# Altium PCB ifly watch_v3.PcbDoc
Units mil, origin at the board's own origin, x right, y up, seen from the top; angles counter-clockwise.
Board outline 2976.01 x 1191.13 mil, 2 copper layers (Top Layer, Bottom Layer); 61 components, 48 nets, 272 pads, 41 vias.
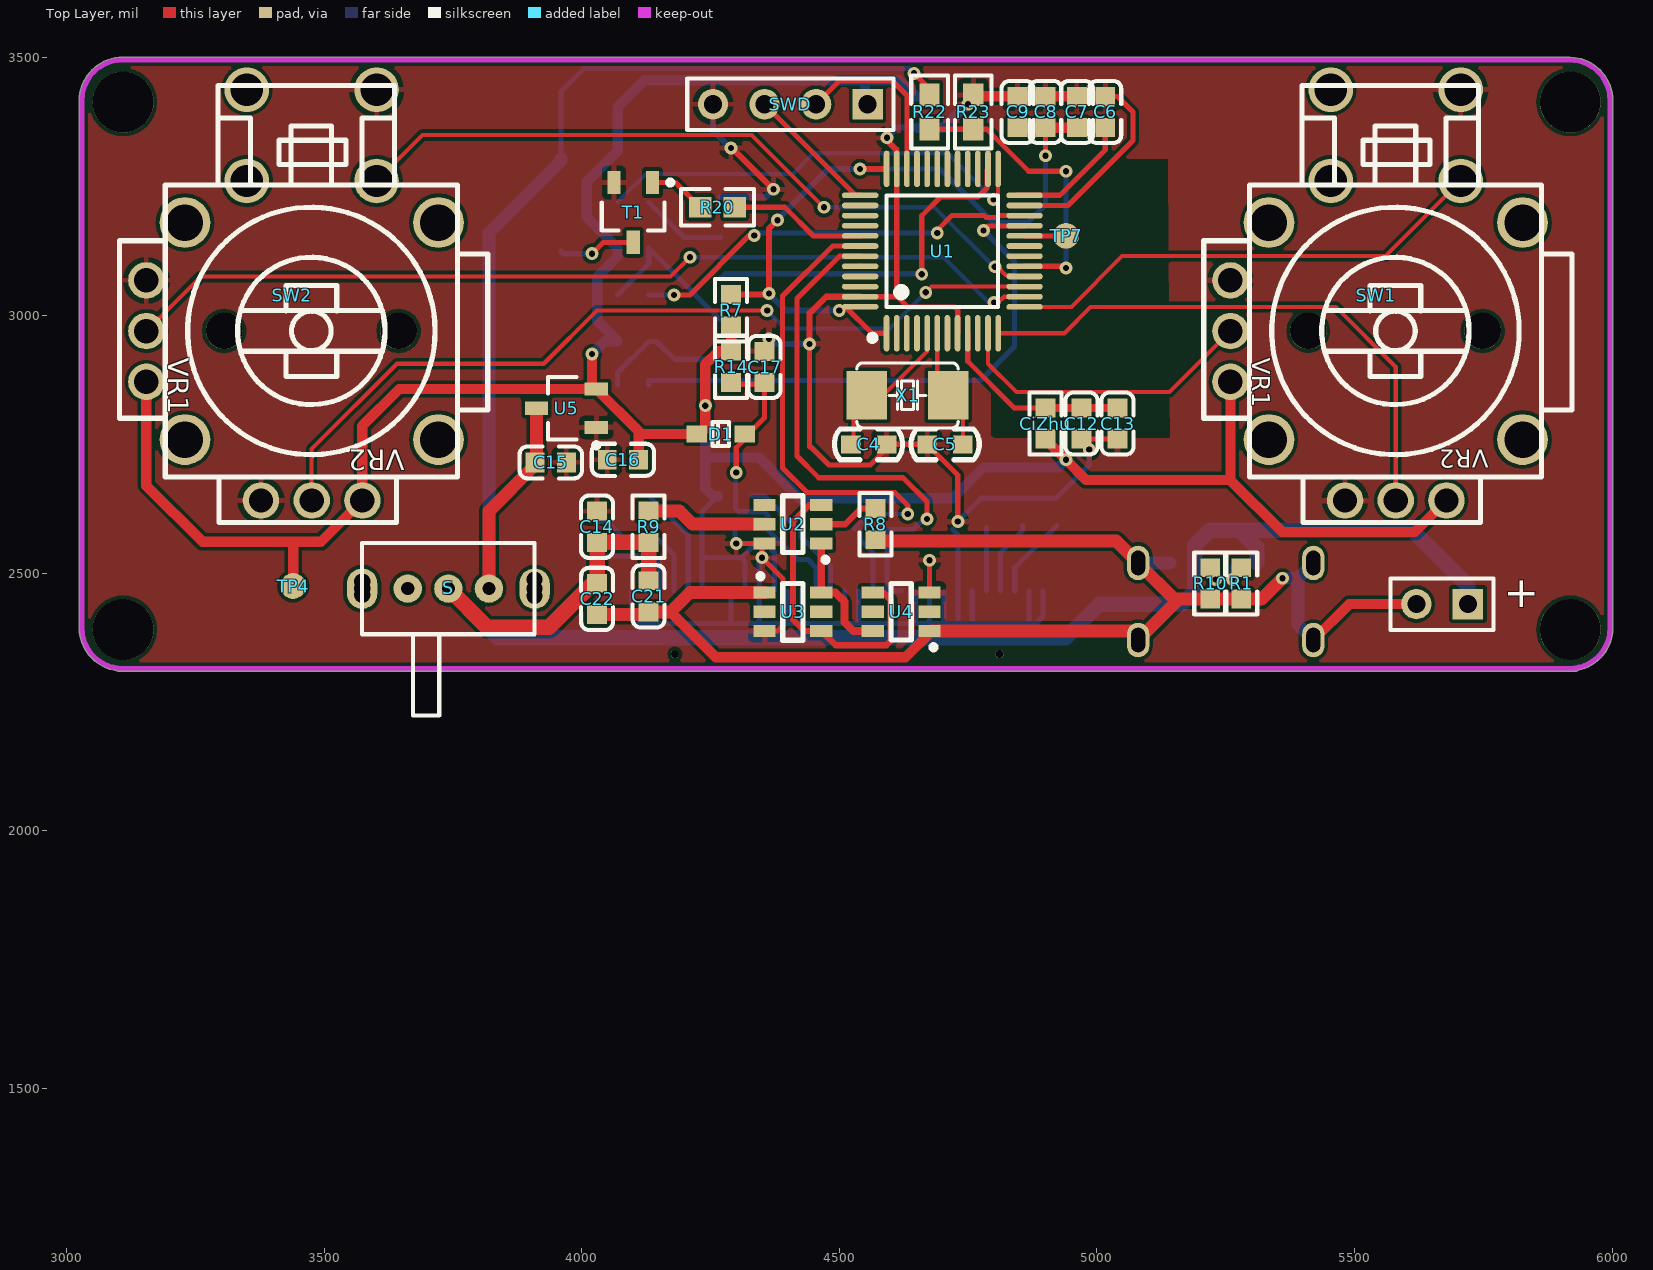
[diagram p0: Top Layer view]
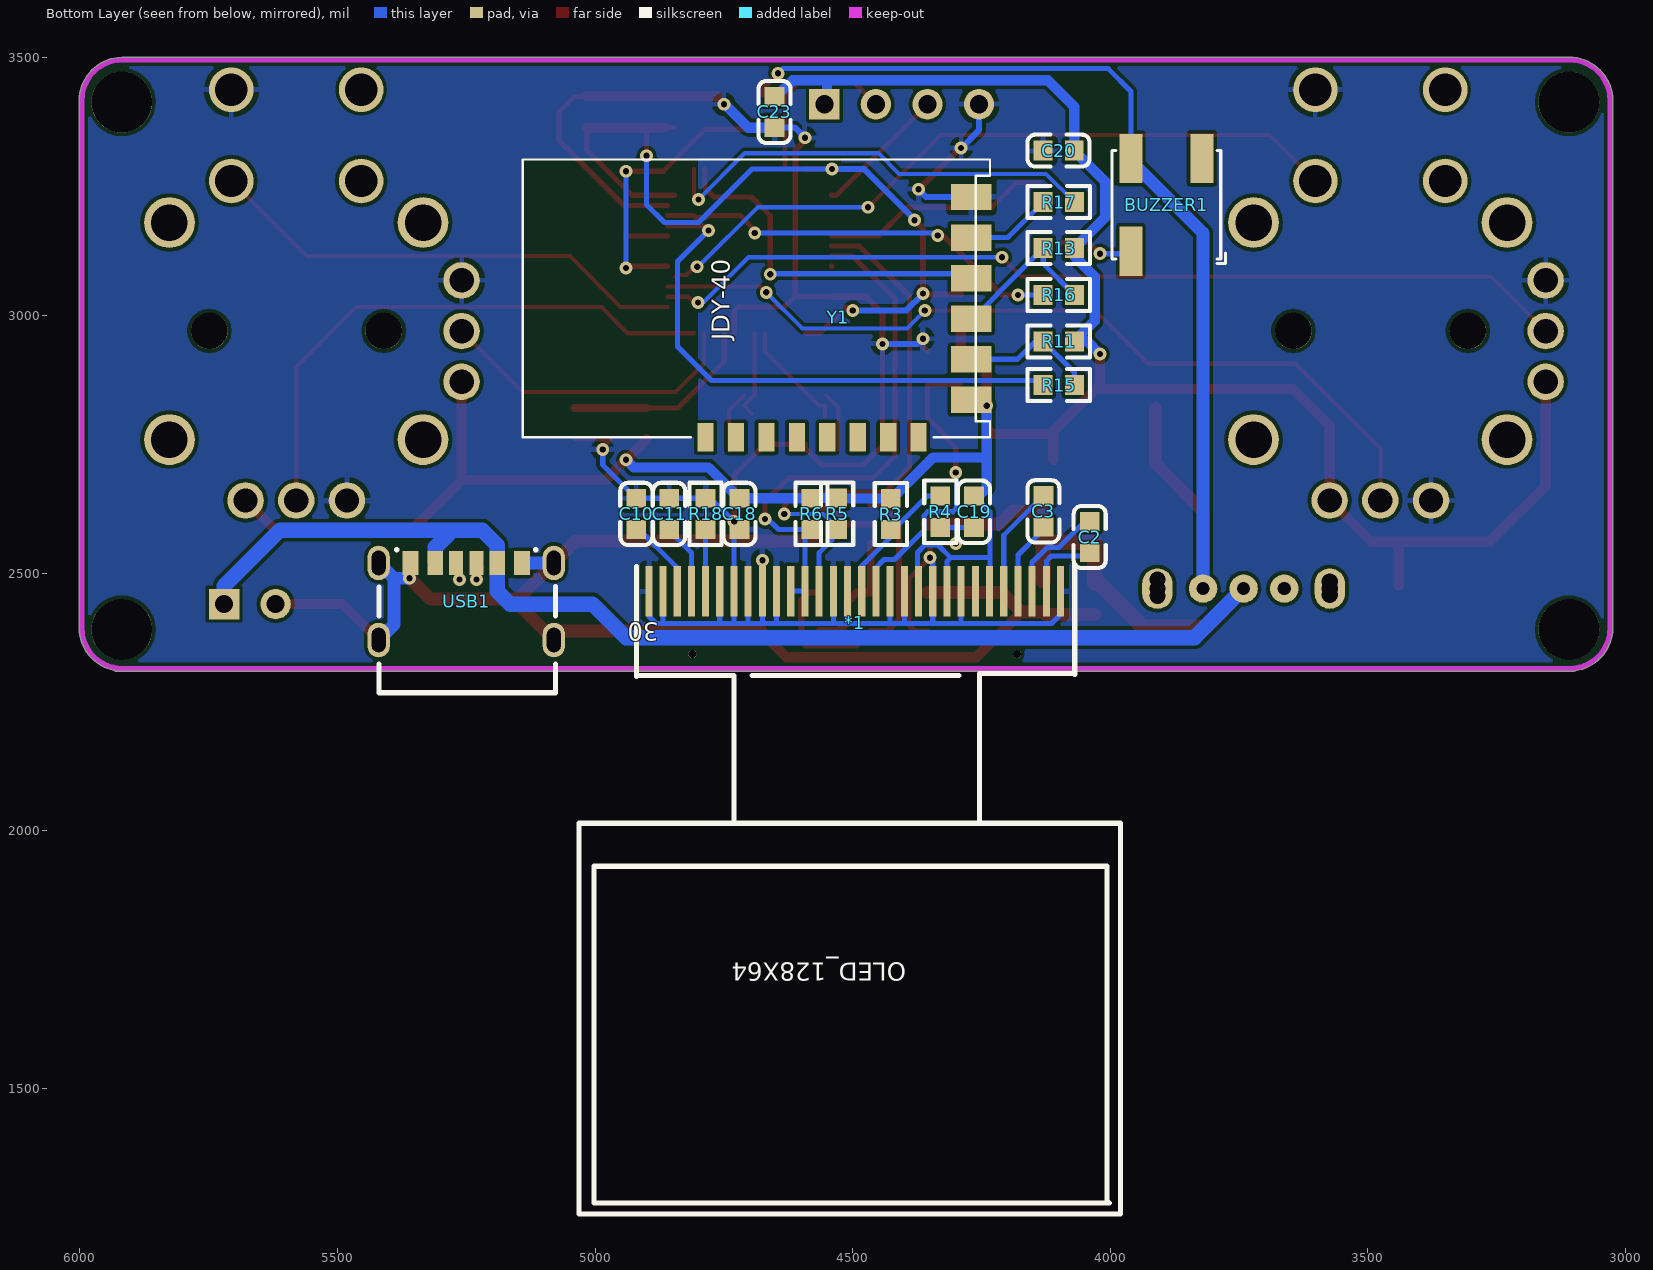
[diagram p1: Bottom Layer view, seen from below]
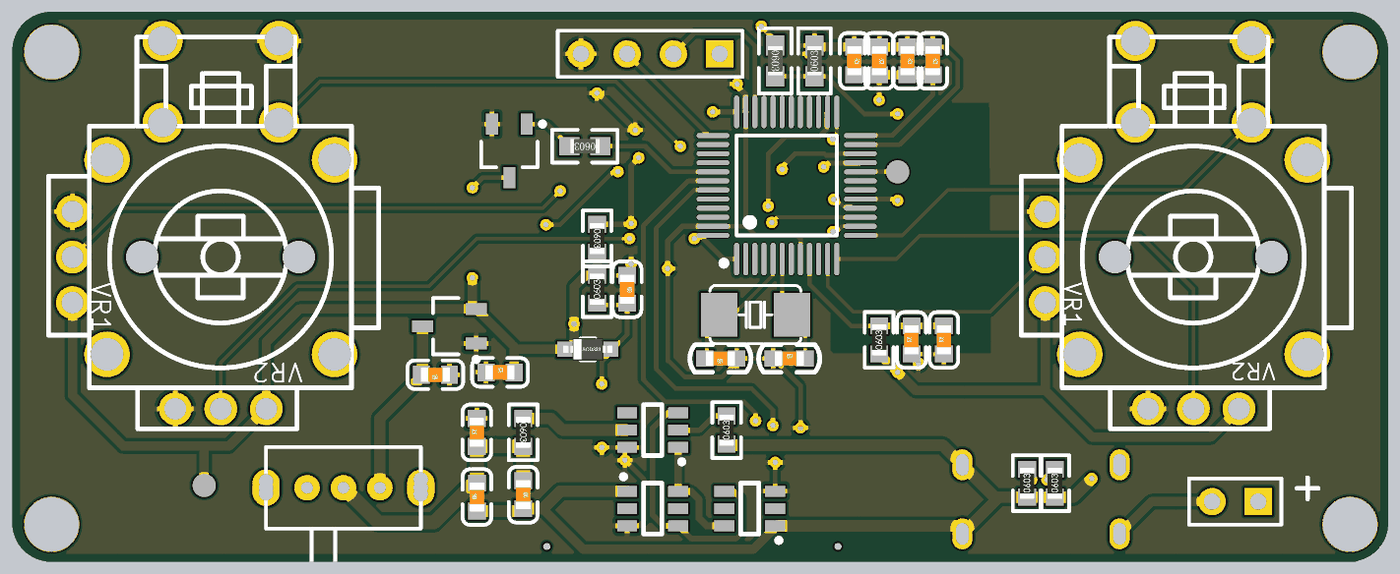
[diagram p2: 3D render of the assembled board from above, using the file's embedded part models]
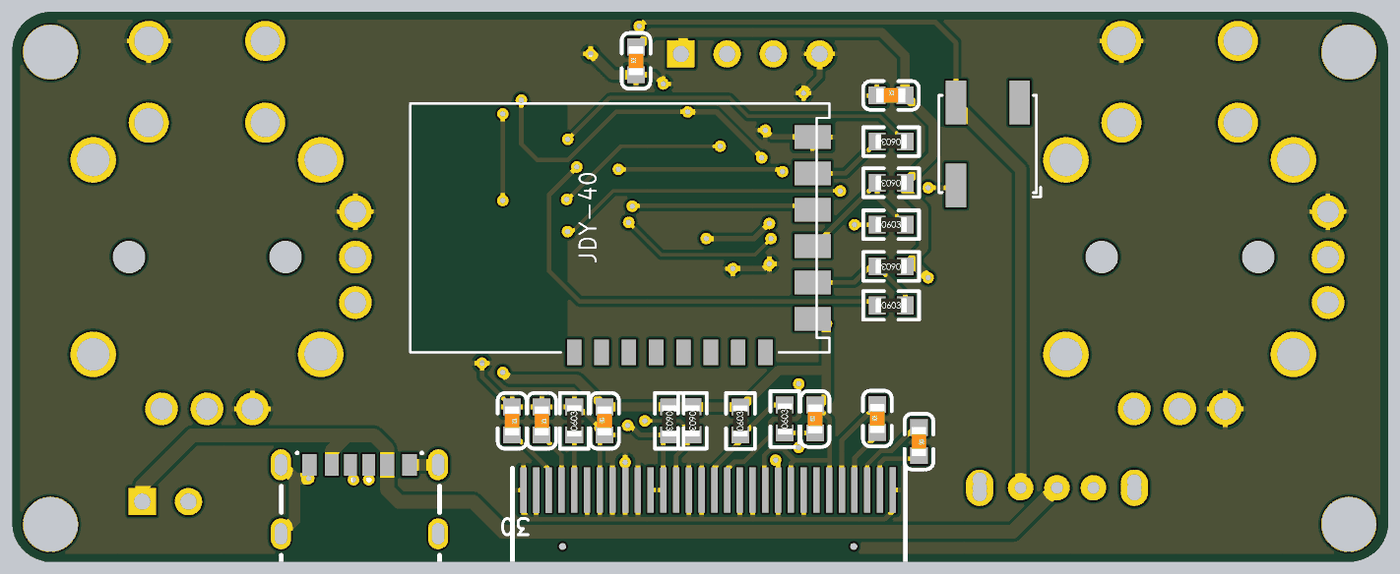
[diagram p3: 3D render of the assembled board from below, using the file's embedded part models]

## Layer stack, top to bottom
Top Solder: solder mask 0.4, Solder Resist, Dk 3.5
Top Layer: signal copper 1.4
Dielectric 1: dielectric 12.6, FR-4, Dk 4.8
Bottom Layer: signal copper 1.4
Bottom Solder: solder mask 0.4, Solder Resist, Dk 3.5

## Board outline
3024.99,2393.74 ccw(c3108.74,2393.74) 3097.31,2310.77 ccw(c3100,2315) 3100,2309.98 5930,2309.99 ccw(c5930,2315) 5933.7,2311.62 ccw(c5917.24,2393.74) 6001,2393.74 ccw(c5995.98,2393.74) 6001,2393.77 6001,3417.36 ccw(c5917.24,3417.36) 5918.91,3501.1 ccw(c5918.5,3496.1) 5918.5,3501.12 3108.74,3501.12 ccw(c3108.74,3417.36) 3024.99,3417.36

## Design rules (kind name [scope] priority, off if disabled: settings)
Clearance [All] p1: gap=7 ignorepadtopadclearanceinfootprint=FALSE
MinimumSolderMaskSliver [All] p1: minsoldermaskwidth=0
PolygonConnect [All] p1: connectstyle=Relief reliefconductorwidth=10 reliefentries=4 polygonreliefangle="90 Angle" airgapwidth=10
RoutingVias [All] p1: holewidth=12 width=25 viastyle="Through Hole" minholewidth=12 minwidth=25 maxholewidth=25 maxwidth=50
SilkToSilkClearance [All] p1: silktosilkclearance=0
SilkToSolderMaskClearance [IsPad] p1: minsilkscreentomaskgap=0 clearancetoexposedcopper=TRUE
SolderMaskExpansion [All] p1: expansion=4
Width [All] p1: maxlimit=100 minlimit=7 preferedwidth=10
27 further rules are at their usual default settings.

## Components (designator, comment, footprint, x,y, rotation, side; value= is the part's Value field where it differs from the comment)
*1 "OLED_30Pin" OLED_0.96-30P-P0.70-12864 4495.98,2464.99 r0 bottom
+ "Header 2" HDR1X2 5720,2440 r180 top (schematic designator BAT)
BUZZER1 "MLT-5020" BUZ-SMD_3P-L5.2-W5.2-P3.50-BR 3891.1,3214.94 r180 bottom
C2 "1uF" LC-0603_C 4040,2570 r270 bottom
C3 "1uF" LC-0603_C 4130,2620 r90 bottom
C4 "20pf" C0603 4591.73,2750 r180 top value=22pF
C5 "22pF" C0603 4670.47,2750 r0 top
C6 "104" LC-0603_C 5016.05,3395 r270 top
C7 "104" LC-0603_C 4961.05,3395 r270 top
C8 "104" LC-0603_C 4900.27,3395 r270 top
C9 "104" LC-0603_C 4846.05,3395 r270 top
C10 "2.2uF" LC-0603_C 4920,2615 r270 bottom
C11 "4.7uF" LC-0603_C 4856.06,2615 r270 bottom
C12 "104" LC-0603_C 4970,2790.31 r90 top
C13 "1uF" LC-0603_C 5040,2790.31 r90 top
C14 "104" LC-0603_C 4029.68,2590 r90 top
C15 "1uF" LC-0603_C 3940,2715 r180 top
C16 "1uF" LC-0603_C 4080,2720 r0 top
C17 "106" LC-0603_C 4354.88,2900 r270 top
C18 "1uF" LC-0603_C 4720,2615 r90 bottom
C19 "1uF" LC-0603_C 4264.57,2619.06 r90 bottom
C20 "104" LC-0603_C 4100.43,3320 r180 bottom
C21 "104" LC-0603_C 4130,2455 r270 top
C22 "106" LC-0603_C 4030,2450 r90 top
C23 "104" LC-0603_C 4651.81,3395 r90 bottom
CiZhu "600R" 0603_R 4900,2790.31 r90 top value=?
D1 "1N4148WS T4" LC-SOD-323 4270,2770 r0 top
R1 "5.1kΩ" LC-0603_R 5280,2480 r90 top
R3 "4.7KΩ" LC-0603_R 4426.09,2614.68 r90 bottom
R4 "4.7KΩ" LC-0603_R 4330,2619.06 r90 bottom
R5 "4.7KΩ" LC-0603_R 4530,2615.32 r270 bottom
R6 "4.7KΩ" LC-0603_R 4580,2615 r270 bottom
R7 "0Ω" LC-0603_R 4290,3010.32 r270 top
R8 "1KΩ" LC-0603_R 4570,2595 r90 top
R9 "100Ω" LC-0603_R 4130,2590 r270 top
R10 "5.1kΩ" LC-0603_R 5220,2480 r90 top
R11 "4.7KΩ" LC-0603_R 4100,2949.74 r0 bottom
R13 "4.7KΩ" LC-0603_R 4100,3130.87 r0 bottom
R14 "4.7KΩ" LC-0603_R 4290,2900.32 r90 top
R15 "100Ω" LC-0603_R 4100,2865 r180 bottom
R16 "100Ω" LC-0603_R 4100,3040 r180 bottom
R17 "100Ω" LC-0603_R 4100,3220 r0 bottom
R18 "1MΩ" LC-0603_R 4785.59,2615 r90 bottom
R20 "10k" R0603 4263.46,3210 r180 top value=1KΩ
R22 "10k" R0603 4675.12,3395 r270 top value=10KΩ
R23 "10k" R0603 4760,3395 r90 top value=10KΩ
S "SW-SPDT" 8.5*3.5_3P 3741.26,2471.97 r0 top
SW1 "RKJXV1224005" RKJXV1224005 5579.94,2969.74 r180 top
SW2 "RKJXV1224005" RKJXV1224005 3475.98,2969.74 r180 top
SWD "Header 4" HDR1X4 4554.88,3410 r180 top
T1 "SS8050" SOT-23-3L 4100,3200 r90 top
TP4 "TestPoint" TestPoint 3440,2475 r90 top
TP7 "TestPoint" TestPoint 4940,3154.53 r90 top
U1 "STM32F103C8T6" LC-LQFP-48_7x7x05P 4700,3125 r0 top
U2 "DW01KA" SOT-23-6 4410,2595 r0 top
U3 "SC8205C" SOT-23-6 4410,2425 r180 top
U4 "SC8205C" SOT-23-6 4620,2425 r0 top
U5 "SC662K-3.3V" SOT-23-3L 3970.31,2820 r0 top
USB1 "TYPE-C 6P" TYPE-C-SMD_TYPE-C-6P 5250,2445 r180 bottom
X1 "5032" SMD5032-2 4632.36,2845 r180 top
Y1 "JDY-40_1" "JDY-401 -No via" 4785.42,2763.43 r90 bottom

## Footprints (in the part's own frame and the unit in brackets; to place one, negate y for a bottom-side part, rotate by r counter-clockwise, add the part's x,y. Pads: shape width x height; smd on the part's side, far side on the other; paste and mask are expansions set on the pad)
8.5*3.5_3P [mm]
  round 1.4 hole 0.65: 1(2,-0.05) 2(0,-0.05) 3(-2,-0.05)
  oval 1.5x2 hole 0.8: 4(-4.25,-0.05) 5(4.25,-0.05)
  round 0.8 hole 0.8: 18(-4.25,0.3) 19(-4.25,-0.35) 20(4.25,0.4) 21(4.25,-0.4)
  silkscreen extent -4.25,-6.3 4.25,2.2
0603_R [mm]
  rect 0.93x0.98 smd: 1(-0.77,0) 2(0.77,0)
  silkscreen extent -1.53,-0.79 1.54,0.79, body extent -0.85,-0.4 0.85,0.4, height 0.56
BUZ-SMD_3P-L5.2-W5.2-P3.50-BR [mm]
  rect 1.12x2.425 smd: 1(1.75,2.288) 2(-1.75,2.288) 3(-1.75,-2.287)
  silkscreen extent -2.68,-2.9 2.9,2.68
C0603 [mil]
  rect 38x35 smd: 1(0,0) 2(69,0)
  silkscreen extent -31,-30 101,30, body extent 4,-16 67,16, height 12
HDR1X2 [mm] "Connector; Header; 2 Position"
  rect 1.5x1.5 hole 0.9: 1(0,0)
  round 1.5 hole 0.9: 2(2.54,0)
  silkscreen extent -1.27,-1.27 3.81,1.27
HDR1X4 [mm] "Connector; Header; 4 Position"
  rect 1.5x1.5 hole 0.9: 1(0,0)
  round 1.5 hole 0.9: 2(2.54,0) 3(5.08,0) 4(7.62,0)
  silkscreen extent -1.27,-1.27 8.89,1.27
"JDY-401 -No via" [mm] "串口透传"
  rect 1.4x0.8 smd: 1(0,0) 2(0,-1.5) 3(0,-3) 4(0,-4.5) 5(0,-6) 6(0,-7.5) 7(0,-9) 8(0,-10.5)
  rect 1.3x2 smd: 9(1.85,-13.092) 10(3.85,-13.092) 11(5.85,-13.092) 12(7.85,-13.092) 13(9.85,-13.092) 14(11.85,-13.092)
  silkscreen extent 0,-14.02 13.7,9.01
LC-0603_C [mm]
  rect 0.93x0.98 smd: 1(-0.77,0) 2(0.77,0)
  silkscreen extent -1.53,-0.79 1.54,0.79, body extent -0.8,-0.4 0.8,0.4, height 0.3
LC-0603_R [mm]
  rect 0.93x0.98 smd: 1(-0.77,0) 2(0.77,0)
  silkscreen extent -1.53,-0.79 1.54,0.79, body extent -0.85,-0.4 0.85,0.4, height 0.56
LC-LQFP-48_7x7x05P [mm]
  oval 0.28x1.8 smd mask+0.051: 1(-2.75,-4.05) 2(-2.25,-4.05) 3(-1.75,-4.05) 4(-1.25,-4.05) 5(-0.75,-4.05) 6(-0.25,-4.05) 7(0.25,-4.05) 8(0.75,-4.05) 9(1.25,-4.05) 10(1.75,-4.05) 11(2.25,-4.05) 12(2.75,-4.05) 25(2.75,4.05) 26(2.25,4.05) 27(1.75,4.05) 28(1.25,4.05) 29(0.75,4.05) 30(0.25,4.05) 31(-0.25,4.05) 32(-0.75,4.05) 33(-1.25,4.05) 34(-1.75,4.05) 35(-2.25,4.05) 36(-2.75,4.05)
  oval 1.8x0.28 smd mask+0.051: 13(4.05,-2.75) 14(4.05,-2.25) 15(4.05,-1.75) 16(4.05,-1.25) 17(4.05,-0.75) 18(4.05,-0.25) 19(4.05,0.25) 20(4.05,0.75) 21(4.05,1.25) 22(4.05,1.75) 23(4.05,2.25) 24(4.05,2.75) 37(-4.05,2.75) 38(-4.05,2.25) 39(-4.05,1.75) 40(-4.05,1.25) 41(-4.05,0.75) 42(-4.05,0.25) 43(-4.05,-0.25) 44(-4.05,-0.75) 45(-4.05,-1.25) 46(-4.05,-1.75) 47(-4.05,-2.25) 48(-4.05,-2.75)
  silkscreen extent -3.6,-4.42 2.75,2.75
LC-SOD-323 [mm]
  rect 1x0.83 smd: 1(1.18,0) 2(-1.18,0)
  silkscreen extent -0.4,-0.6 0.4,0.6, body extent -1.35,-0.62 1.35,0.62, height 1.1
OLED_0.96-30P-P0.70-12864 [mm]
  rect 0.351x2.499 smd: 1(-10.149,-0.002) 2(-9.444,0) 3(-8.744,0) 4(-8.044,0) 5(-7.344,0) 6(-6.644,0) 7(-5.944,0) 8(-5.244,0) 9(-4.544,0) 10(-3.844,0) 11(-3.144,0) 12(-2.444,0) 13(-1.744,0) 14(-1.044,0) 15(-0.344,0) 16(0.356,0) 17(1.056,0) 18(1.756,0) 19(2.456,0) 20(3.156,0) 21(3.856,0) 22(4.556,0) 23(5.256,0) 24(5.956,0) 25(6.656,0) 26(7.356,0) 27(8.056,0) 28(8.751,0.001) 29(9.45,0.002) 30(10.149,0.002)
  round 0.4 hole 0.4 unplated: ""(-8,3.1) ""(8,3.1)
  silkscreen extent -13.1,-1.3 13.6,30.7
R0603 [mm]
  rect 1.1x1 smd: 1(-0.85,0) 2(0.85,0)
  silkscreen extent -1.8,-0.9 1.8,0.9, body extent -0.8,-0.4 0.8,0.4, height 0.45
RKJXV1224005 [mm]
  round 1.8 hole 1.2: 1(8.15,-2.5) 2(8.15,0) 3(8.15,2.5) 4(2.5,8.35) 5(0,8.35) 6(-2.5,8.35)
  round 2.5 hole 1.8: 7(-6.25,5.35) 8(-6.25,-5.35) 9(6.25,-5.35) 10(6.25,5.35)
  round 2.2 hole 1.6: a(-3.2,-7.4) b(-3.2,-11.9) c(3.2,-7.4) d(3.2,-11.9)
  round 1.8 hole 1.8 unplated: ""(-4.284,-0.006) ""(4.316,-0.006)
  silkscreen extent -8.68,-12.11 9.47,9.44
SMD5032-2 [mm]
  rect 2x2.4 smd: 1(-2,0) 2(2,0)
  silkscreen extent -2.5,-1.6 2.5,1.6
SOT-23-3L [mm] "http://www.aosmd.com/res/packaging_information/SOT-23-3L.pdf"
  rect 1.15x0.65 smd: 1(1.475,-0.95) 2(1.475,0.95) 3(-1.475,0)
  silkscreen extent -0.9,-1.95 1.6,1.55, body extent -0.9,-1.55 0.9,1.55, height 1.25
SOT-23-6 [mm]
  rect 1.1x0.6 smd: 1(1.4,-0.95) 2(1.4,0) 3(1.4,0.95) 4(-1.4,0.95) 5(-1.4,0) 6(-1.4,-0.95)
  silkscreen extent -0.5,-1.87 1.73,1.4
TestPoint [mil]
  round 50 smd: 1(0,0)
TYPE-C-SMD_TYPE-C-6P [mm]
  oval 1.1x1.7 hole 0.7 slot 1.2 at 90 deg: 7(-4.32,-1.9) 7(-4.32,1.9) 7(4.32,-1.9) 7(4.32,1.9)
  rect 0.7x1.2 smd: A5(-0.5,1.9) B5(0.5,1.9)
  rect 0.76x1.2 smd: A9(1.52,1.9) B9(-1.52,1.9)
  rect 0.8x1.2 smd: A12(2.75,1.9) B12(-2.75,1.9)
  silkscreen extent -4.3,-4.5 4.4,2.55

## Part data
+: "Header, 2-Pin", LatestRevisionDate=17-Jul-2002, LatestRevisionNote="Re-released for DXP Platform.", Publisher="Altium Limited"
BUZZER1: BOM_JLCPCB Part Class="Extended Part", BOM_Manufacturer=HNDZ, BOM_Manufacturer Part=MLT-5020, BOM_Supplier=LCSC, BOM_Supplier Part=C94598, spicePre=B, spiceSymbolName=MLT-5020
C2 C3 C13 C15 C16 C18 C19 C22: library part "0603 1uF (105) 10% 50V", "贴片电容", Package=0603, SuppliersPartNumber=C15849, ComponentLink1Description=供应商链接, ComponentLink1URL=http://www.szlcsc.com/product/details_16531.html, Supplier=LC
C4 C5: library part "Cap Chip 0805", "Polarized Capacitor (Radial)", Published=8-Jun-2000, Publisher="Altium Limited", Revision="July-2002: Re-released for DXP Platform."
C6 C7 C8 C9 C12 C14 C20 C21: library part "0603 100nF (104) 10% 50V", "贴片电容", Package=0603, SuppliersPartNumber=C14663, ComponentLink1Description=供应商链接, ComponentLink1URL=http://www.szlcsc.com/product/details_15331.html, Supplier=LC
C10: library part "0603 2.2uF (225) 10% 16V", "贴片电容", Package=0603, SuppliersPartNumber=C23630, ComponentLink1Description=供应商链接, ComponentLink1URL=http://www.szlcsc.com/product/details_24366.html, Supplier=LC
C11: library part "0603 4.7uF (475) 10% 16V", "贴片电容", Package=0603, SuppliersPartNumber=C19666, ComponentLink1Description=供应商链接, ComponentLink1URL=http://www.szlcsc.com/product/details_20375.html, Supplier=LC
C17: library part "0603 10uF (106) 10% 10V", "贴片电容", Package=0603, SuppliersPartNumber=C19702, ComponentLink1Description=供应商链接, ComponentLink1URL=http://www.szlcsc.com/product/details_20411.html, Supplier=LC
C23: library part "Cap Chip 0603", "Polarized Capacitor (Radial)", Published=8-Jun-2000, Publisher="Altium Limited", Revision="July-2002: Re-released for DXP Platform."
CiZhu: library part Cizhu, "电阻_磁珠"
D1: library part "SOD-323 1N4148WS T4", "二极管", Package=SOD-323, SuppliersPartNumber=C2128, ComponentLink1Description=供应商链接, ComponentLink1URL=http://www.szlcsc.com/product/details_2485.html, Supplier=LC
R1 R9 R10 R15 R16 R17: library part "0603 100Ω (1000) 1%", "贴片电阻", Package=0603, SuppliersPartNumber=C22775, ComponentLink1Description=供应商链接, ComponentLink1URL=http://www.szlcsc.com/product/details_23502.html, Supplier=LC
R3 R4 R5 R6 R11 R13 R14: library part "0603 4.7KΩ (4701) 1%", "贴片电阻", Package=0603, SuppliersPartNumber=C23162, ComponentLink1Description=供应商链接, ComponentLink1URL=http://www.szlcsc.com/product/details_23889.html, Supplier=LC
R7: library part "0603 0Ω (0R0) 1%", "贴片电阻", Package=0603, SuppliersPartNumber=C21189, ComponentLink1Description=供应商链接, ComponentLink1URL=http://www.szlcsc.com/product/details_21903.html, Supplier=LC
R8: library part "0603 1KΩ (1001) 1%", "贴片电阻", Package=0603, SuppliersPartNumber=C21190, ComponentLink1Description=供应商链接, ComponentLink1URL=http://www.szlcsc.com/product/details_21904.html, Supplier=LC
R18: library part "0603 1MΩ (1004) 1%", "贴片电阻", Package=0603, SuppliersPartNumber=C22935, ComponentLink1Description=供应商链接, ComponentLink1URL=http://www.szlcsc.com/product/details_23662.html, Supplier=LC
R20 R22 R23: library part "Resistor Chip 0805", "Resistor", Published=8-Jun-2000, Publisher="Altium Limited", Revision="July-2002: Re-released for DXP Platform."
S: "SPDT Subminiature Toggle Switch, Right Angle Mounting, Vertical Actuation", Datasheet="Latest Revision: 05-Dec-2000", Published=24-Mar-1999, Publisher="Altium Limited", Revision 1="Jul-2002: Re-released for DXP Platform.", Revision 2="17-Dec-2003: Schematic revised, PCB Footprint replaced."
SW1 SW2: BOM_JLCPCB Part Class="Extended Part", BOM_Manufacturer="ALPS Electric", BOM_Manufacturer Part=RKJXV1224005, BOM_Supplier=LCSC, BOM_Supplier Part=C146170, Contributor=LCSC, spicePre=S, spiceSymbolName=RKJXV1224005
SWD: "Header, 4-Pin", LatestRevisionDate=17-Jul-2002, LatestRevisionNote="Re-released for DXP Platform.", Publisher="Altium Limited"
T1: library part NPN
U1: "STM32 ARM-based 32-bit MCU with 64 Kbytes Flash, 48-pin LQFP, Industrial Temperature"
U2: "锂电池保护芯片"
U3 U4: "二合一MOS"
U5: "LDO"
USB1: BOM_JLCPCB Part Class="Extended Part", BOM_Manufacturer="SHOU HAN", BOM_Manufacturer Part="TYPE-C 6P", BOM_Supplier=LCSC, BOM_Supplier Part=C456012, Contributor=LCSC, spicePre=U, spiceSymbolName="TYPE-C 6P"
X1: library part XTAL, "Crystal Oscillator", Frequency=8MHz, Published=8-Jun-2000, Publisher="Altium Limited", Revision="July-2002: Re-released for DXP Platform."
Y1: "串口透传无过孔"

## Free pads (board coordinates)
  round 118.11 hole 118.11: M3(3110,2390.55) M3(3110,3414.17) M3(5918.5,2390.55) M3(5918.5,3414.17)

## Via types
v1: diameter 25, hole 12, Top Layer to Bottom Layer, 41 vias

## Nets (pads, with @x,y where several pads share a name; then routed paths per layer and width w, separated by ;. In a path a pad name is that pad's centre, name@x,y a point inside that pad or via, vN(x,y) a via of type N, cw(c..) or ccw(c..) an arc to the next point about the centre after c; other vN are vias at no path point)
3V3: *1.6 *1.9 *1.11 C16.2 C18.2 C19.2 C20.2 C23.2 CiZhu.1 D1.2 R3.2 R5.1 R6.1 R7.2 R11.1 R13.1 R14.2 SW1.3 SW1.6 SW2.3 SW2.6 SWD.1 TP4.1 U5.2 Y1.9 | length 5784.8
  Top Layer w20: SW2.3 3155.12,2669.88 3264.34,2560.66 3440,2560.66 ; TP4.1 3440,2560.66 ; v1(4020,2925) 4020,2865.79 U5.2 ; C16.2 4110.63,2720.32 4110.63,2770 ; R7.2 R14.2 4265.63,2930.63 4240,2905 v1(4240,2825) 4240,2780 4230,2770 D1.2 4110.63,2770 ; CiZhu.1 v1(4940,2720) 4979.38,2680.62 5259.07,2680.62 ; SW1.3@5259.07,2851.32 5259.07,2680.62 ; SW1.6 5617.36,2580 5359.69,2580 5259.07,2680.62 ; 3440,2560.66 3494.07,2560.66 SW2.6 3574.41,2785.73 3646.08,2857.4 U5.2 ; U5.2 4110.63,2775.16 4110.63,2770
  Bottom Layer w10: *1.6@4233.28,2465 *1.6 4233.28,2466.13 4233.28,2530 ; C19.2@4263.56,2649.37 4233.28,2619.09 4233.28,2530 ; *1.9 4317.08,2522.76 4309.84,2530 ; *1.11 4374.5,2467.3 4374.5,2540.15 4360.15,2554.5 4334.34,2554.5 4309.84,2530 ; 4233.28,2530 4309.84,2530
  Bottom Layer w20: v1(4020,2925) 4044.74,2949.74 R11.1 4030,2989.43 4030,3075 4069.69,3114.69 R13.1 4010,3190.55 4010,3259.89 C20.2 4070.11,3404.57 4069.69,3405 4121.21,3456.53 4550,3456.53 ; v1(4240,2825) 4240,2720 ; C19.2@4255.2,2649.69 4240,2664.88 4240,2720 ; C19.2@4263.56,2649.37 C19.2 ; SWD.1 4550,3414.88 4550,3456.53 ; C23.2 4647.97,3425.32 4616.75,3456.53 4550,3456.53 ; v1(4940,2720) 4925,2705 4779.69,2705 C18.2 4580.31,2645.32 R6.1 4579.68,2645.63 R5.1 4529.37,2645 R3.2 4423.11,2645 4343.61,2724.5 4244.5,2724.5 4240,2720
BAT: +.1 C14.1 C21.1 C22.2 R9.2 S.2 USB1.A9 USB1.B9 | length 2913.2
  Top Layer w30: S.2 3816.26,2395 3936.6,2395 4021.92,2480.32 C22.2 4030,2559.37 C14.1 4070,2559.68 ; 4070.98,2560.66 4070,2559.68 ; C21.1 R9.2 4070,2559.68
  Bottom Layer w30: S.2 3836.26,2375 4940,2375 5005,2440 5164.92,2440 5190.16,2465.24 USB1.A9 5190.16,2554.37 5219.36,2583.57 5611.43,2583.57 5720,2475 +.1 ; 5284.73,2575.27 5309.84,2550.16 USB1.B9
BAT+: BUZZER1.2 C15.2 R22.1 S.1 U5.3 | length 2192.2
  Top Layer w10: v1(4645,3470) 4675.12,3439.88 R22.1
  Top Layer w25: S.1@3820,2460 S.1 3820,2620.31 3912.24,2712.56 U5.3
  Bottom Layer w10: BUZZER1.2 3960,3435 4004.1,3479.1 4635.9,3479.1 v1(4645,3470)
  Bottom Layer w25: S.1@3820,2460 S.1 3820,3160 3960,3300 BUZZER1.2
BOOT0: U1.44 | length 0.7
  Top Layer w10: U1.44@4540.08,3095 U1.44
BOOT1: TP7.1 U1.20 | length 80.6
  Top Layer w10: U1.20 TP7.1
BUZZER: R20.1 U1.41 | length 266.6
  Top Layer w10: R20.1 4394.21,3210 4449.68,3154.53 U1.41
CS: R17.1 U1.25 | length 869.5
  Top Layer w8: v1(4799.49,3225) 4808.27,3233.78 U1.25
  Bottom Layer w8: R17.1 4124.69,3275 4410,3275 4450,3315 4709.49,3315 v1(4799.49,3225)
GND: *1.1 *1.8 *1.10 *1.12 *1.13 *1.16 *1.17 *1.21 *1.22 *1.23 *1.24 *1.25 *1.29 *1.30 C4.1 C5.1 C6.1 C7.1 C8.1 C9.1 C10.1 C11.1 C12.1 C13.1 C14.2 C15.1 C16.1 C17.1 C18.1 C19.1 C20.1 C23.1 R4.1 R18.2 R23.2 SW1.1 SW1.4 SW1.b SW2.1 SW2.4 SW2.b SWD.4 T1.2 U1.8 U1.23 U1.35 U1.47 U2.6 U3.3 U4.3 U5.1 Y1.14 | length 5411.8
  Top Layer w10: v1(4300,2557.6) U2.6 4350,2552.72 v1(4350,2530) 4390.98,2489.02 4390.98,2398.58 4380,2387.6 U3.3 ; v1(4442.4,2945) 4442.4,2745 4445,2745 4480,2710 4560,2710 4591.73,2741.73 C4.1 C5.1 4730,2690.47 v1(4730,2600) ; U1.47 4611.42,3036.42 ; U1.35 4611.42,3038.1 4632.79,3016.73 4723.27,3016.73 4730,3010 4730,2966.02 U1.8 ; U4.3 4675.12,2524.77 v1(4675.35,2525) ; U1.23 4944.1,3213.58 5070,3339.48 5070,3395 5039.69,3425.31 C6.1 ; v1(4985,2740) 4985,2745 C12.1 C13.1
  Top Layer w12: v1(4289.52,3325) 4292.2,3325 v1(4372.2,3245) ; C17.1 4363.51,2938.94 v1(4363.51,2955) ; v1(4442.4,2945) 4442.4,3004.25 4474.57,3036.42 U1.47 ; v1(4592.79,3345) 4592.79,3339.49 4610.73,3321.55 4610.73,3285.13 U1.35
  Top Layer w20: R23.2@4763.15,3425.32 C9.1 C8.1 C7.1 C6.1
  Bottom Layer w10: *1.1 4096.41,2419.69 4114.1,2402 4290,2402 ; C19.1 4297.28,2588.74 ; *1.8 4289.52,2402.48 4290,2402 ; v1(4300,2557.6) 4297.28,2560.32 4297.28,2588.74 ; R4.1 4297.28,2588.74 ; v1(4350,2530) 4344.64,2524.64 *1.10 4344.64,2406.64 4340,2402 ; *1.12 4399.76,2402.24 4400,2402 ; *1.13 4427.32,2404.68 4430,2402 ; *1.16 4510,2402 ; *1.17 4537.56,2404.44 4540,2402 ; *1.21 4647.79,2404.21 4650,2402 ; v1(4675.35,2525) *1.22 4675.35,2407.35 4670,2402 ; *1.23 4702.91,2404.91 4700,2402 ; C18.1 4730.47,2574.22 *1.24 4730.47,2402.47 4730,2402 ; v1(4730,2600) 4775.32,2645.32 R18.2 C11.1 C10.1 4920.31,2645.32 4985,2710 v1(4985,2740) ; *1.25 4758.03,2403.97 4760,2402 ; *1.29 4868.03,2403.97 4870,2402 ; *1.30 4895.55,2415.55 4882,2402 4870,2402 ; 4290,2402 4340,2402 ; 4340,2402 4400,2402 ; 4400,2402 4430,2402 ; 4430,2402 4510,2402 ; 4510,2402 4540,2402 ; 4540,2402 4650,2402 ; 4650,2402 4670,2402 ; 4670,2402 4700,2402 ; 4700,2402 4730,2402 ; 4730,2402 4760,2402 ; 4760,2402 4870,2402
  Bottom Layer w12: SWD.4 4254.88,3359.64 v1(4289.52,3325) ; Y1.14 4357.16,3229.96 v1(4372.2,3245) ; v1(4363.51,2955) 4373.51,2945 v1(4442.4,2945) ; v1(4592.79,3345) 4612.79,3365 4651.49,3365 C23.1
  Bottom Layer w20: C23.1 4702.72,3364.68 4748.03,3410 v1(4750,3410)
Net*1_2: *1.2 C2.2 | length 159.2
  Bottom Layer w10: C2.2@4030,2539.68 4036.68,2533 4114.37,2533 4124.17,2523.2 *1.2
Net*1_3: *1.3 C2.1 | length 210.4
  Bottom Layer w10: C2.1@4030,2600.32 C2.1 4049.68,2600.32 4100,2550 4122.48,2550 4151.73,2520.75 *1.3
Net*1_4: *1.4 C3.1 | length 141
  Bottom Layer w10: C3.1@4140,2589.68 4140,2574.29 4179.29,2535 *1.4
Net*1_5: *1.5 C3.2 | length 217.1
  Bottom Layer w10: C3.2 4206.85,2573.47 *1.5
Net*1_15: *1.15 R3.1 R4.2 | length 269
  Bottom Layer w10: R4.2 4355.63,2649.37 4415,2590 4426.09,2590 R3.1 4426.09,2570.29 4482.44,2513.94 *1.15
Net*1_26: *1.26 R18.1 | length 123.7
  Bottom Layer w10: *1.26 R18.1 R18.1@4785.59,2588.74
Net*1_27: *1.27 C11.2 | length 145.4
  Bottom Layer w10: *1.27 4813.15,2540 4856.06,2582.91 C11.2 C11.2@4856.06,2592.6
Net*1_28: *1.28 C10.2 | length 161.2
  Bottom Layer w10: *1.28 4840.51,2510.45 C10.2@4922.34,2592.28
NetBUZZER1_3: BUZZER1.3 T1.3 | length 151.1
  Top Layer w10: v1(4020,3120) 4041.93,3141.93 T1.3
  Bottom Layer w10: BUZZER1.3 3964.88,3120 v1(4020,3120)
NetC4_2: C4.2 U1.5 X1.2 | length 333.8
  Top Layer w8: C4.2@4527.4,2740 4527.4,2821.14 X1.2@4551.26,2845 ; X1.2@4553.62,2801.69 4553.62,2825 4565,2825 4670.47,2930.47 U1.5
NetC5_2: C5.2 U1.6 X1.1 | length 287.2
  Top Layer w8: U1.6 4690.16,2845.94 4711.1,2825 X1.1@4696.26,2810.16 ; X1.1 4740,2816.1 C5.2@4740,2740
NetR1_2: R1.2 USB1.A5 | length 50.5
  Top Layer w10: v1(5262.98,2487.49) 5262.98,2492.98 R1.2@5270,2500
  Bottom Layer w10: v1(5262.98,2487.49) 5262.98,2513.1 USB1.A5
NetR8_2: R8.2 U2.2 | length 117.4
  Top Layer w12: U2.2 4511.61,2595 4541.93,2625.32 R8.2
NetR9_1: R9.1 U2.5 | length 235.4
  Top Layer w25: R9.1 4189.69,2620.31 4215,2595 U2.5
NetR10_2: R10.2 USB1.B5 | length 47
  Top Layer w10: R10.2 5230,2520.32 v1(5230,2487.49)
NetR11_2: R11.2 R15.2 Y1.10 | length 263.9
  Bottom Layer w10: R15.2 4069.68,2889.11 R11.2 4145.26,2949.74 4180,2915 Y1.10
NetR13_2: R13.2 R16.2 Y1.11 | length 312.8
  Bottom Layer w10: R16.2 4130.32,3100.63 R13.2 4218.63,3042.55 4218.63,3041.92 4266.81,2993.74 Y1.11
NetR17_2: R17.2 Y1.13 | length 168.2
  Bottom Layer w10: R17.2 4199.09,3151.22 Y1.13
NetR20_2: R20.2 T1.1 | length 112.5
  Top Layer w10: T1.1 4181.93,3258.07 R20.2
OC: U2.3 U3.4 U4.4 | length 592.8
  Top Layer w12: U2.3 4442.4,2632.4 4410,2600 4410,2410.55 4432.96,2387.6 U3.4 4492.72,2360 4591.42,2360 4600,2368.58 4600,2447.64 4585.24,2462.4 U4.4
OD: U2.1 U3.6 U4.6 | length 249.3
  Top Layer w15: U2.1 U3.6 4492.48,2462.4 4510,2444.88 4510,2405 4527.4,2387.6 U4.6
PA1: SW1.2 U1.11 | length 601.5
  Top Layer w8: U1.11 4788.58,2906.42 4843.68,2851.32 5140.64,2851.32 SW1.2
PA2: SW1.5 U1.12 | length 1100
  Top Layer w8: U1.12 4936.85,2965.55 4987.73,3016.43 5463.57,3016.43 5579.94,2900.07 SW1.5
PA3: SW1.a U1.13 | length 947.7
  Top Layer w8: U1.13 4950.52,3016.73 5048.94,3115.16 5559.99,3115.16 SW1.a
PA4: SW2.2 U1.14 | length 1809.8
  Top Layer w8: SW2.2 3261.16,3075.79 4172.72,3075.79 v1(4210,3113.07) v1@4213.46,3116.54 ; v1(4800,3025) 4808.27,3025 4819.69,3036.42 U1.14
  Bottom Layer w8: v1(4210,3113.07) 4701.93,3113.07 4790,3025 v1(4800,3025)
PA5: SW2.5 U1.15 | length 1643
  Top Layer w8: SW2.5 3475.98,2740.98 3641.42,2906.42 3926.42,2906.42 4030,3010 v1(4360,3010) ; v1(4667.79,3045) 4678.89,3056.1 U1.15
  Bottom Layer w8: v1(4360,3010) 4395,2975 4597.79,2975 v1(4667.79,3045)
PA6: SW2.a U1.16 | length 1404.8
  Top Layer w8: SW2.a 3690.89,3350 4330,3350 v1(4470,3210) ; v1(4801.85,3094.61) 4807.03,3094.61 4822.69,3078.96 4840.51,3078.96 U1.16@4843.68,3075.79
  Bottom Layer w8: v1(4470,3210) 4684.73,3210 4797.24,3097.49 4797.24,3087.76 4801.85,3092.38 v1(4801.85,3094.61)
PGND: +.2 C21.2 C22.1 R1.1 R8.1 R10.1 U3.1 U4.1 USB1.7 USB1.A12 USB1.B12 | length 2786.9
  Top Layer w20: 4172.28,2424.68 4259.97,2337 4628.42,2337 U4.1@4679.02,2387.6 ; USB1.7@5420.08,2370.2 5489.88,2440 +.2
  Top Layer w25: C22.1 4125,2419.68 C21.2 4172.28,2424.68 4210,2462.4 U3.1 ; R8.1 4572.44,2562.25 5037.48,2562.25 5079.92,2519.8 5150.04,2449.69 5159.41,2449.69 ; U4.1@4679.02,2387.6 5079.92,2387.6 5079.92,2370.2 5159.41,2449.69 ; v1(5360,2490) 5319.69,2449.69 R1.1 R10.1 5159.41,2449.69
  Bottom Layer w25: USB1.7@5079.92,2519.8 USB1.A12 ; v1(5360,2490) 5390.27,2490 ; USB1.7@5420.08,2370.2 5390.27,2400 5390.27,2490 ; USB1.7@5420.08,2519.8 5390.27,2490
POWER: R22.2 R23.1 U1.17 | length 568.1
  Top Layer w10: R22.2 R23.1 4786.15,3361.54 4867.69,3280 v1(4940,3280) ; U1.17 4930,3095.47 4933.1,3092.38 v1(4940,3092.38)
  Bottom Layer w10: v1(4940,3092.38) v1(4940,3280)
RES#: *1.14 C17.2 D1.1 R14.1 | length 596.1
  Top Layer w10: R14.1 4293.54,2866.46 4354.88,2866.46 4354.88,2801.57 4316.46,2763.15 4316.46,2759.76 4300,2743.31 v1(4300,2695)
  Bottom Layer w10: v1(4300,2695) 4298.71,2693.71 4298.71,2626.09 4305.74,2619.06 4350.19,2619.06 4354.26,2619.05 4361.29,2612.02 4361.29,2583.71 4418.8,2526.2 4439.19,2526.2 4454.88,2510.51 *1.14
RESET: U1.7
SCL: *1.18 R5.2 U1.42 | length 1061.8
  Top Layer w10: 4390.98,2705 4390,2704.02 ; U1.42 4487.24,3134.84 4390,3037.6 4390,2704.02 ; v1(4632.79,2615) 4632.79,2631 4607.58,2656.21 4437.8,2656.21 4390,2704.02
  Bottom Layer w8: R5.2 4530,2587.84 4557.16,2615 v1(4632.79,2615)
  Bottom Layer w10: R5.2@4540,2584.68 4540,2564.8 4565.11,2539.68 *1.18
SDA: *1.19 *1.20 R6.2 U1.43 | length 1038.5
  Top Layer w10: U1.43 4500.16,3115.16 4417.9,3032.9 4417.9,2727.1 4460,2685 4623.79,2685 4670,2638.79 v1(4670,2605)
  Bottom Layer w10: R6.2 R6.2@4592.67,2584.68 ; *1.20 *1.19 R6.2@4592.67,2584.68 ; v1(4670,2605) 4670,2610.58 4644.1,2584.68 R6.2@4592.67,2584.68
SET: U1.26 Y1.12 | length 694.3
  Top Layer w10: v1(4660,3080) 4660,3193.74 4696.26,3230 4769.14,3230 4786.41,3247.27 4786.41,3282.28 U1.26
  Bottom Layer w10: Y1.12 4278.52,3081 4659,3081 v1(4660,3080)
SWCLK: SWD.3 U1.37 | length 258.9
  Top Layer w10: SWD.3 4531.61,3233.27 U1.37
SWDIO: SWD.2 U1.34 | length 349.1
  Top Layer w10: SWD.2 4499.88,3455 4603.25,3455 4631.1,3427.15 U1.34
USART3_RX: R16.1 U1.22 | length 799
  Top Layer w10: v1(4179.29,3040) 4210,3040 4325,3155 v1(4335,3155) ; v1(4690.16,3160) 4690.16,3165.63 4718.43,3193.9 4781.45,3193.9 4784.85,3190.5 4805.15,3190.5 4808.55,3193.9 U1.22
  Bottom Layer w10: R16.1 v1(4179.29,3040) ; v1(4335,3155) 4340,3160 v1(4690.16,3160)
USART3_TX: R15.1 U1.21 | length 1079.1
  Top Layer w10: v1(4780,3165) 4788.5,3173.5 4858.74,3173.5 U1.21
  Bottom Layer w10: R15.1 4130.31,2873.85 4773.85,2873.85 4840,2940 4840,3105 v1(4780,3165)
VDD: C6.2 C7.2 C8.2 C9.2 R7.1 U1.1 U1.24 U1.36 U1.48 | length 1719.8
  Top Layer w10: v1(4500,3010) 4505.43,3010 4512.17,3016.73 4563.35,2965.55 U1.1 ; v1(4540,3284.45) v1@4545.55,3284.45 ; U1.24@4846.06,3233.27 U1.24 4928.27,3233.27 5016.05,3321.05 C6.2 ; C9.2 C9.2@4864.5,3364.68 ; v1(4900,3310) 4900,3364.42 C8.2
  Top Layer w12: R7.1 4355.63,3040.63 4357.55,3042.55 v1(4363.51,3042.55) 4363.51,3168.51 v1(4380,3185) ; v1@4545.55,3284.45 U1.36
  Top Layer w20: C9.2@4864.5,3364.68 C8.2@4900,3364.68 ; C8.2 C6.2
  Bottom Layer w10: v1(4540,3284.45) 4695.2,3284.45 4799.27,3180.37 4865.37,3180.37 4900,3215 v1(4900,3310)
  Bottom Layer w12: v1(4363.51,3042.55) 4396.06,3010 v1@4490,3010 ; v1(4380,3185) 4380,3186.06 4478.39,3284.45 v1(4540,3284.45)
VDDA: C12.2 C13.2 CiZhu.2 U1.9 | length 382.7
  Top Layer w10: U1.9 4749.21,2911.05 4839.63,2820.63 CiZhu.2
  Top Layer w15: CiZhu.2 C12.2 C13.2
pads on no net: *1. *1.7 BUZZER1.1 S.3 S.4 S.5 S.18 S.19 S.20 S.21 SW1. SW1.7 SW1.8 SW1.9 SW1.10 SW1.c SW1.d SW2. SW2.7 SW2.8 SW2.9 SW2.10 SW2.c SW2.d U1.2 U1.3 U1.4 U1.10 U1.18 U1.19 U1.27 U1.28 U1.29 U1.30 U1.31 U1.32 U1.33 U1.38 U1.39 U1.40 U1.45 U1.46 U2.4 U3.2 U3.5 U4.2 U4.5 Y1.1 Y1.2 Y1.3 Y1.4 Y1.5 Y1.6 Y1.7 Y1.8

## Polygon pours and split planes (outlines as drawn)
GND on Top Layer "gnd" (solid, remove dead copper, pour order 0): 2900,3560 2960,3500 2960,2230 6035,2230 6250,2445 6250,3525 6160,3615
GND on Bottom Layer "gnd2" (solid, remove dead copper, pour order 2): 2920,3555 2970,3505 2970,2145 5980,2145 6130,2295 6080,2345 6080,3640

## Keep-outs
Keep-Out Layer:
  lines w10: 3100,2315 5930,2315 ; 3108.74,2315 cw(c3108.74,2393.74) 3030,2393.74 3030,3417.36 cw(c3108.74,3417.36) 3108.74,3496.1 5918.5,3496.1 ; 5917.24,2315 ccw(c5917.24,2393.74) 5995.98,2393.74 5995.98,3417.36 ccw(c5917.24,3417.36) 5917.24,3496.1

## Other copper
Top Layer:
  pour cut-out: 5137.95,3304.06 4794.16,3304.06 4794.16,2767.54 4800.32,2761.37 5142.28,2761.37
Bottom Layer:
  pour cut-out: 5141.73,3305 4800,3305 4800,2763.43 5141.73,2763.43

## Text inside footprints (layer, text, board x,y; h text height)
*1: Bottom Overlay "30" at 4876.54,2403.52 h35 r180; Bottom Overlay "OLED_128X64" at 4395.94,1744.02 h35 r180
SW1: Top Overlay "VR1" at 5301.91,2918.47 h35 r270; Top Overlay "VR2" at 5760.41,2739.53 h35 r180
SW2: Top Overlay "VR1" at 3197.96,2918.47 h39.37 r270; Top Overlay "VR2" at 3656.46,2739.53 h39.37 r180
Y1: Bottom Overlay "JDY-40" at 4739,2952.43 h35 r270